# Altium PCB board.PcbDoc
Units mm, origin at the board's own origin, x right, y up, seen from the top; angles counter-clockwise.
Board outline 20.5 x 13 mm, 2 copper layers (Top Layer, Bottom Layer), stack 0.97 mm thick; 31 components, 23 nets, 86 pads, 12 vias.
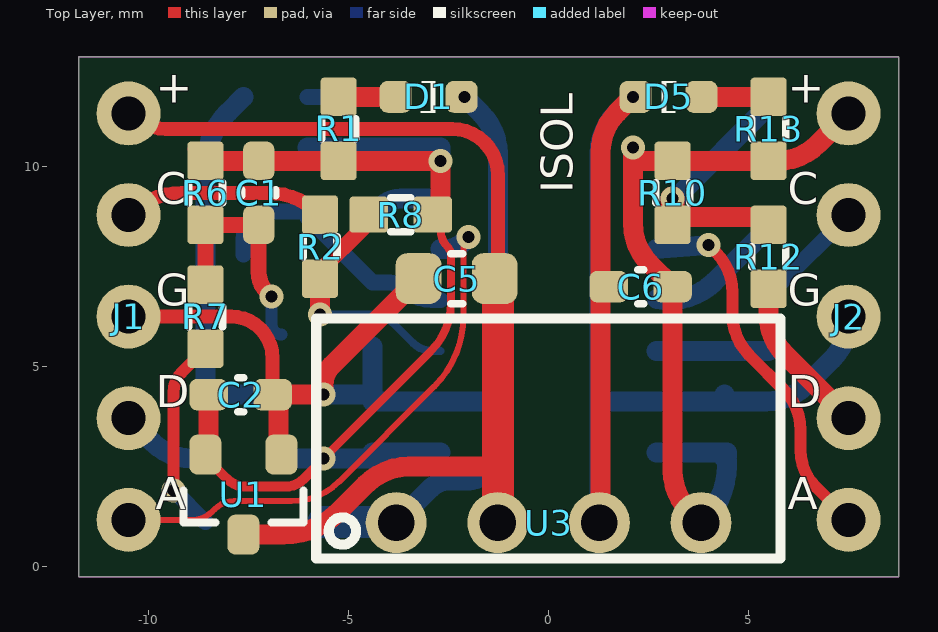
[diagram p0: Top Layer view]
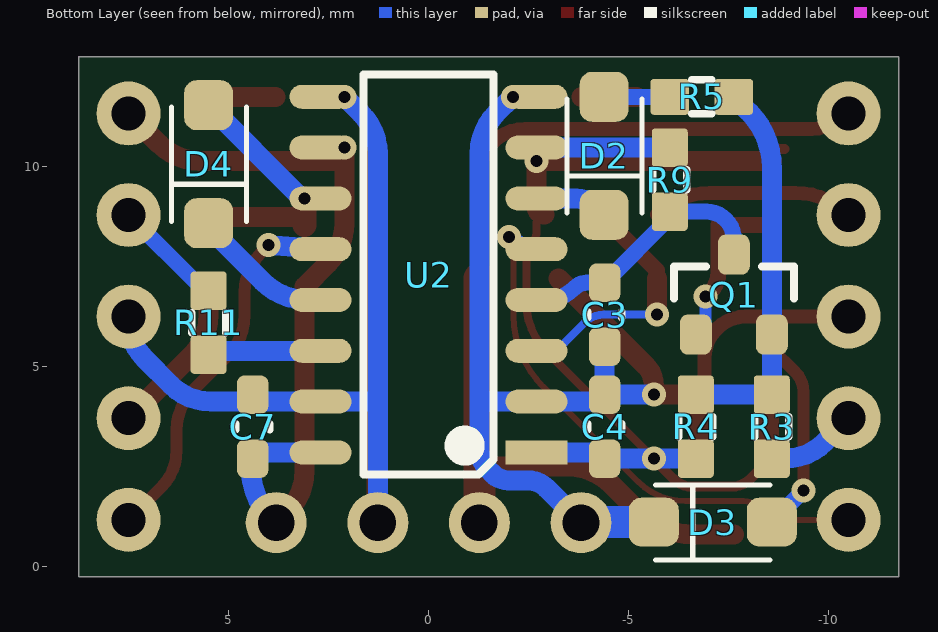
[diagram p1: Bottom Layer view, seen from below]
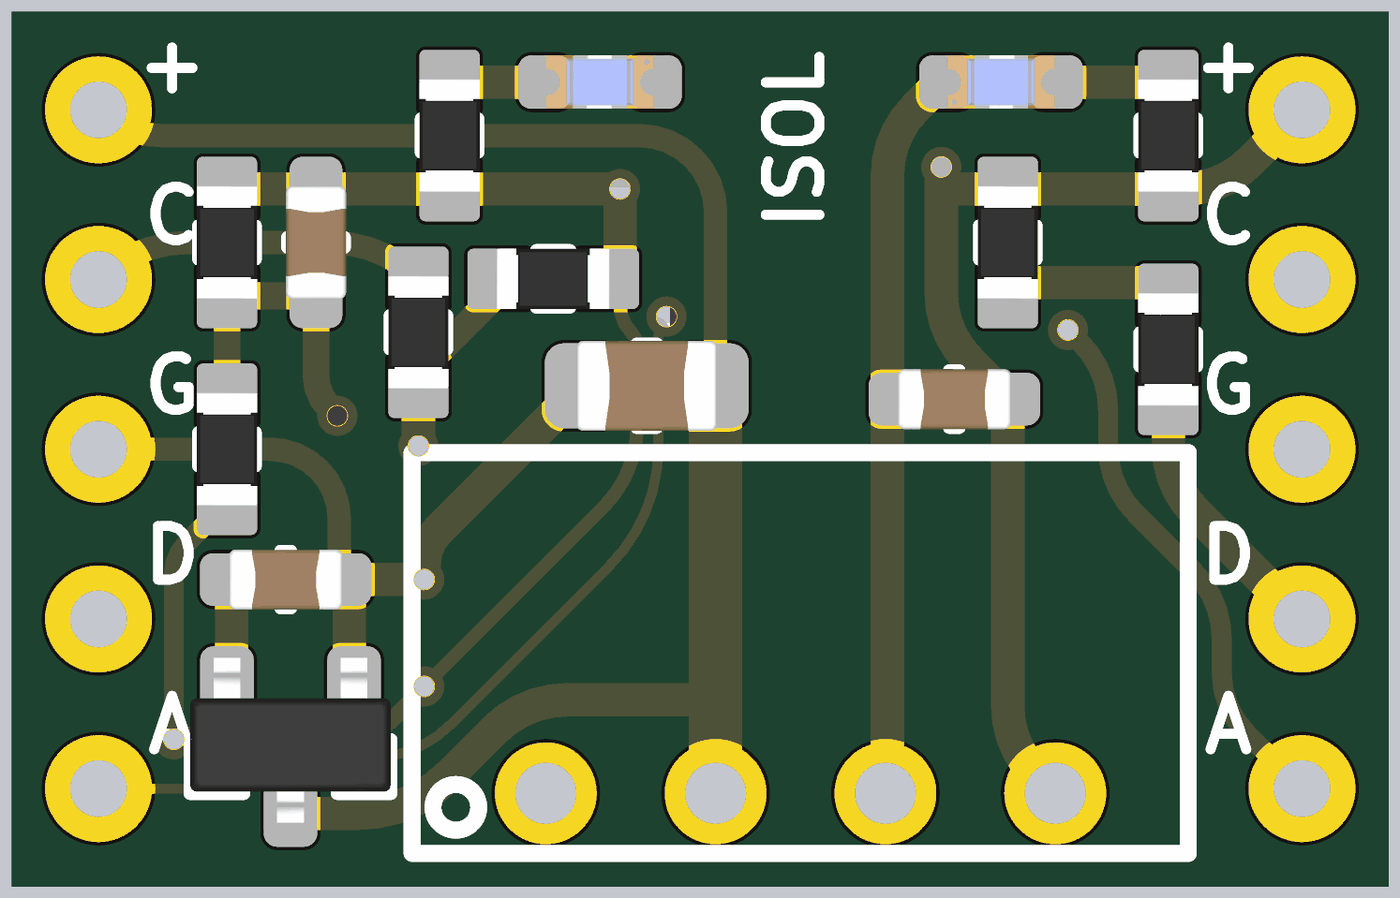
[diagram p2: 3D render of the assembled board from above, using the file's embedded part models]
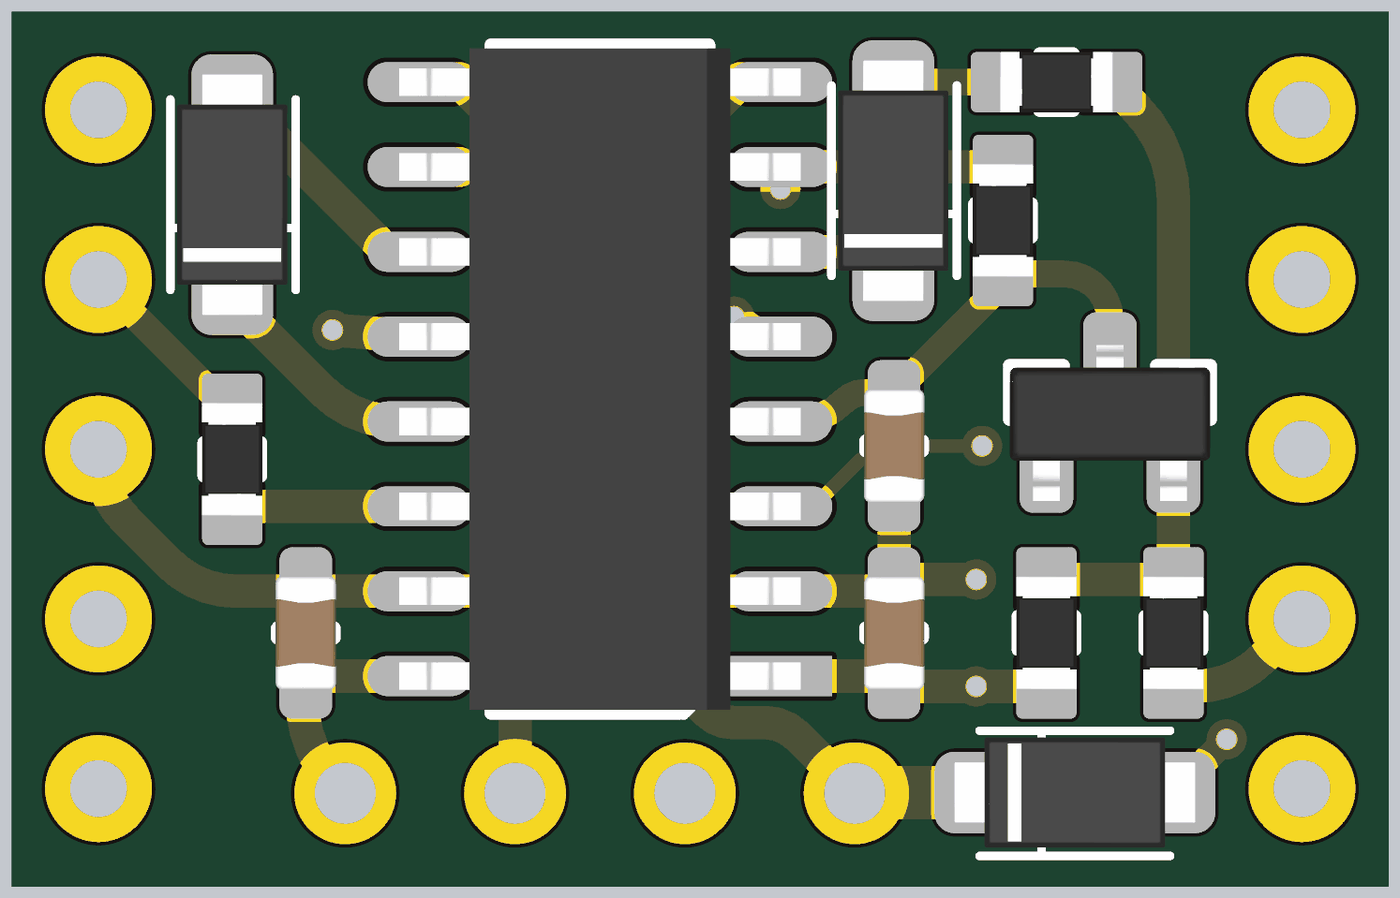
[diagram p3: 3D render of the assembled board from below, using the file's embedded part models]

## Layer stack, top to bottom
Top Solder: solder mask 0.0127, Solder Resist, Dk 3.8
Top Layer: signal copper 0.035
Dielectric: core 0.9, FR-4, Dk 4.5
Bottom Layer: signal copper 0.035
Bottom Solder: solder mask 0.0127, Solder Resist, Dk 3.8

## Board outline
-11.75,-0.25 -11.75,12.75 8.75,12.75 8.75,-0.25

## Design rules (kind name [scope] priority, off if disabled: settings)
AcuteAngle [All] p1: minimum=6.00000000000000E+0001 checktracksonly=FALSE
BoardOutlineClearance [All] p1: gap=0.3 ignorepadtopadclearanceinfootprint=FALSE
Clearance Clearance_1 [All] p1: gap=0.25 ignorepadtopadclearanceinfootprint=FALSE except(0.13: Arc-Arc Arc-Track Arc-SMDPad Arc-Via Track-Track Track-SMDPad Track-Via SMDPad-SMDPad SMDPad-Via THPad-Via Via-Via; 0.15: Arc-THPad Arc-Text Arc-Hole Track-THPad Track-Text Track-Hole SMDPad-THPad SMDPad-Text SMDPad-Hole THPad-THPad THPad-Text THPad-Hole Via-Text Via-Hole Fill-Text Fill-Hole Poly-Text Poly-Hole Region-Text Region-Hole Text-Text Text-Hole)
ComponentClearance ComponentClearance_1 [IsFree] p1: gap=-1 collisioncheckmode=3 verticalgap=2540 showdistances=FALSE
ComponentClearance [All] p2: gap=0.3 collisioncheckmode=3 verticalgap=0.254 showdistances=FALSE donotcheckwithout3dbody=TRUE
Height [All] p1: minheight=0 maxheight=500 prefheight=12.7
HoleSize [All] p1: absolutevalues=TRUE maxlimit=6 minlimit=0.2 maxpercent=80.000 minpercent=20.000
HoleToHoleClearance HoleToHoleClearance_1 [IsVia vs IsThruPin] p1: gap=0.7 allowstackedmicrovias=TRUE
HoleToHoleClearance [All] p2: gap=0.5 allowstackedmicrovias=TRUE
MinimumSolderMaskSliver [All] p1 off: minsoldermaskwidth=0.254
PlaneClearance [All] p1: clearance=0.45
PlaneConnect [All] p1: planeconnectstyle=Direct reliefexpansion=0.3 reliefentries=4 reliefconductorwidth=0.381 reliefairgap=0.178
PolygonConnect [All] p1: connectstyle=Direct reliefconductorwidth=0.381 reliefentries=4 polygonreliefangle="90 Angle" airgapwidth=0.356
RoutingVias [All] p1: holewidth=0.3 width=0.6 viastyle="Through Hole" minholewidth=0.2 minwidth=0.45 maxholewidth=0.9 maxwidth=1.27
SilkToSilkClearance [All] p1 off: silktosilkclearance=0.254
SilkToSolderMaskClearance [IsPad] p1 off: minsilkscreentomaskgap=0.254 clearancetoexposedcopper=TRUE
SolderMaskExpansion [All] p1: expansion=0.05 istentingtop=FALSE
SupplyNets "Schematic Supply Nets_4" [InNet('3V3')] p1: voltage=0.000
SupplyNets "Schematic Supply Nets_3" [InNet('GND')] p2: voltage=0.000
SupplyNets "Schematic Supply Nets_2" [InNet('GNDi')] p3: voltage=0.000
SupplyNets "Schematic Supply Nets_1" [InNet('5V')] p4: voltage=0.000
SupplyNets "Schematic Supply Nets" [InNet('3V3i')] p5: voltage=0.000
UnRoutedNet [All] p1: checkbadconnections=TRUE
Width [All] p1: maxlimit=3.81 minlimit=0.14 preferedwidth=0.254
20 further rules are at their usual default settings.

## Components (designator, comment, footprint, x,y, rotation, side; value= is the part's Value field where it differs from the comment)
C1 "1nF" C0603 -7.247,9.345 r90 top
C2 "1uF" C0603 -7.7,4.3 r180 top
C3 "10pF" C0603 -4.4,6.3 r90 bottom
C4 "100nF" C0603 -4.4,3.5 r270 bottom
C5 "1uF" C0805 -2.3,7.2 r0 top
C6 "1uF" C0603 2.3,7 r0 top
C7 "100nF" C0603 4.4,3.5 r270 bottom
D1 "BLU" LED-0603-BLU -3,11.745 r0 top
D2 "DIODE" SOD-123FL -4.388,10.27 r270 bottom
D3 "SCHOTTKY DIODE" SOD-123FL -7.104,1.112 r0 bottom
D4 "SCHOTTKY DIODE" SOD-123FL 5.5,10.06 r270 bottom
D5 "BLU" LED-0603-BLU 3,11.745 r180 top
J1 "SWD" HDR-1X5_2.54 -10.5,6.25 r0 top
J2 "SWD_ISOL" HDR-1X5_2.54 7.5,6.25 r0 top
Q1 "MMBT3904" SOT-23 -7.628,6.8 r270 bottom
R1 "1k" R0603 -5.25,10.945 r270 top
R2 "100" R0603 -5.715,8 r270 top
R3 "10" R0603 -8.579,3.5 r270 bottom
R4 "1k5" R0603 -6.678,3.5 r270 bottom
R5 "100" R0603 -6.828,11.745 r180 bottom
R6 "1.3k" R0603 -8.579,9.345 r90 top
R7 "820" R0603 -8.579,6.25 r90 top
R8 "1k5" R0603 -3.7,8.8 r0 top
R9 "820" R0603 -6.028,9.675 r90 bottom
R10 "1k5" R0603 3.1,9.345 r90 top
R11 "100" R0603 5.5,6.1 r270 bottom
R12 "10" R0603 5.5,7.744 r90 top
R13 "1k" R0603 5.5,10.945 r270 top
U1 "XC6206P332MR" SOT-23 -7.628,1.8 r90 top
U2 "π142M31" SOIC-16 0,7.3 r90 bottom
U3 "AM1SS-0503SJZ" PWRM-TH_B2405S-1WR2 0,1.1 r0 top

## Footprints (in the part's own frame and the unit in brackets; to place one, negate y for a bottom-side part, rotate by r counter-clockwise, add the part's x,y. Pads: shape width x height; smd on the part's side, far side on the other; paste and mask are expansions set on the pad)
C0603 [mil] "Chip Capacitor"
  rrect50% 38x31 smd mask+1.97: 1(-31.5,0) 2(31.5,0)
  silkscreen extent -3,-17 3,17, body extent -33,-18 33,18, height 35
C0805 [mil] "Chip Capacitor"
  rrect50% 45x50 smd mask+1.97: 1(-37.5,0) 2(37.5,0)
  silkscreen extent -6,-25 6,25, body extent -41,-27 41,27, height 53
HDR-1X5_2.54 [mm]
  round 1.6 hole 0.85: 1(0,5.08) 2(0,2.54) 3(0,0) 4(0,-2.54) 5(0,-5.08)
LED-0603-BLU [mm]
  rrect50% 0.8x0.8 smd paste+0: 1(-0.825,0) 2(0.825,0)
  silkscreen extent -0.2,-0.4 0.18,0.4, body extent -0.8,-0.4 0.8,0.4, height 0.6
PWRM-TH_B2405S-1WR2 [mil]
  round 60 hole 36 paste-99999 mask+2: 1(-150,0) 2(-50,0) 3(50,0) 4(150,0)
  silkscreen extent -229,-35 228,201, body extent -228,-35 228,201, height 400
R0603 [mil] "Chip Resistor; Body 1.6 x 0.8 mm (LxW typ)"
  rrect20% 38x35.43 smd mask+1.97: 1(-31.5,0) 2(31.5,0)
  silkscreen extent -10,-17 10,17, body extent -33,-18 33,18, height 22
SOD-123FL [mm]
  rrect50% 1.25x1.22 smd: 1(-1.475,0) 2(1.475,0)
  silkscreen extent -1.43,-0.92 1.43,0.95, body extent -1.8,-0.83 1.8,0.82, height 0.95
SOIC-16 [mm]
  rect 0.6x1.55 smd mask+0.07: 1(-4.445,-2.7)
  oval 0.6x1.55 smd mask+0.07: 2(-3.175,-2.7) 3(-1.905,-2.7) 4(-0.635,-2.7) 5(0.635,-2.7) 6(1.905,-2.7) 7(3.175,-2.7) 8(4.445,-2.7) 9(4.445,2.7) 10(3.175,2.7) 11(1.905,2.7) 12(0.635,2.7) 13(-0.635,2.7) 14(-1.905,2.7) 15(-3.175,2.7) 16(-4.445,2.7)
  silkscreen extent -5,-1.63 5,1.62, body extent -4.95,-3 4.95,3, height 1.4
SOT-23 [mm]
  rrect50% 1x0.8 smd mask+0.05: 1(1,-0.95) 2(1,0.95) 3(-1,0)
  silkscreen extent -0.7,-1.5 0.1,1.5, body extent -1.27,-1.5 1.33,1.5, height 1.1

## Part data
C1 C3 C4 C7: library part CAP, "100nF 50V 0603"
C2 C6: library part CAP, "1uF 50V 0603"
C5: library part CAP, "1uF 50V 0805"
D1 D5: library part LED-0603-BLUE, "DIODE LED 0603 BLUE"
D2 D3 D4: library part US1M-13-F
J1 J2: library part "CONN MOLEX HDR-M 1x4"
Q1: library part MMBT2222ALT1G, "MMBT3904 \"1AM\""
R1 R13: library part RES, "1k 0603"
R2 R11: library part RES, "100 0603"
R3 R12: library part RES, "10 0603"
R4 R8 R10: library part RES, "1.5k 0603"
R5: library part RES, "100R 0603"
R6: library part RES, "1.3k 0603"
R7 R9: library part RES, "820 0603"
U1: library part Component_4_1
U3: library part B0503S-1WR2

## Via types
v1: diameter 0.6, hole 0.3, Top Layer to Bottom Layer, tented both sides, 12 vias

## Nets (pads, with @x,y where several pads share a name; then routed paths per layer and width w, separated by ;. In a path a pad name is that pad's centre, name@x,y a point inside that pad or via, vN(x,y) a via of type N, cw(c..) or ccw(c..) an arc to the next point about the centre after c; other vN are vias at no path point)
3V3: C1.2 C2.2 C4.2 R1.2 R4.2 R6.2 R8.2 R9.2 U1.2 U2.1 U2.7 | length 27.8
  Top Layer w0.2: v1(-5.629,2.7) -2.949,5.379 ccw(c-4.174,6.604) -2.442,6.604 -2.442,7.788 ccw(c-2.739,7.788) -2.529,7.998 cw(c-2.116,8.411) -2.7,8.411 -2.7,8.6 R8.2
  Top Layer w0.25: R6.2@-8.9,10.445 R6.2@-8.579,10.445 ; U1.2@-8.5,2.65 -8.051,2.201 ccw(c-7.566,2.686) -7.566,2 -6.592,2 ccw(c-6.592,2.686) -6.108,2.201 v1@-5.619,2.69
  Top Layer w0.5: R6.2 R1.2@-5.338,10.145 ; U1.2@-8.507,2.8 C2.2@-8.507,4.3 ; R1.2 v1(-2.7,10.145) -2.7,9 cw(c-2.9,9) R8.2
  Bottom Layer w0.5: R4.2 v1(-5.629,2.7) C4.2 ; R9.2 U2.7 v1(-2.7,10.145) ; C4.2@-4.4,2.68 C4.2 ; U2.1 -4.4,2.855 C4.2
3V3i: C6.2 C7.2 J2.1 R10.2 R13.2 U2.10 U2.16 U3.4 | length 19.5
  Top Layer w0.5: 2.105,10.145 R10.2 5.726,10.145 ccw(c5.726,11.567) 6.731,10.561 J2.1 ; v1(2.105,10.475) 2.105,8.584 ccw(c3.527,8.584) 2.522,7.578 C6.2 3.1,2.399 ccw(c4.523,2.399) 3.517,1.393 U3.4
  Bottom Layer w0.5: U2.16 4.455,2.855 4.455,2.755 C7.2 4.455,2.645 4.455,2.524 cw(c2.48,2.524) 3.876,1.127 U3.4
5V: C5.2 J1.1 U1.3 U3.2 | length 26
  Top Layer w0.25: J1.1@-11,11.33 J1.1@-10.75,11.58
  Top Layer w0.35: J1.1 ccw(c-9.57,12.26) -9.57,10.945 -2.418,10.945 cw(c-2.418,9.797) -1.27,9.797 C5.2@-1.27,7.2
  Top Layer w0.5: U1.3 -6.631,0.8 ccw(c-6.631,2.747) -5.255,1.37 -4.577,2.048 cw(c-3.485,0.955) -3.485,2.5 -1.297,2.5 cw(c-1.297,2.462) -1.27,2.489
  Top Layer w0.8: U3.2 -1.27,2.489 -1.27,2.5 C5.2@-1.27,7.2
AUX: J1.5 U2.5 | length 14.1
  Top Layer w0.15: J1.5 -8.9,1.17 ccw(c-8.9,1.856) -8.415,1.371 -8.352,1.434 cw(c-7.868,0.949) -7.868,1.635 -6.423,1.635 ccw(c-6.423,3.314) -5.236,2.127 -2.858,4.505 ccw(c-4.619,6.267) -2.128,6.267 -2.128,7.938 cw(c-1.708,7.938) v1(-2.005,8.235)
  Top Layer w0.18: J1.5@-11,1.17 J1.5
  Bottom Layer w0.5: U2.5 -2.589,7.935 ccw(c-2.589,8.621) -2.104,8.136 v1(-2.005,8.235)
AUXi: J2.5 U2.12 | length 9.4
  Top Layer w0.3: v1(4,8.035) 4.183,7.852 cw(c3.178,6.846) 4.6,6.846 4.6,6.289 ccw(c6.022,6.289) 5.017,5.283 5.883,4.417 cw(c4.878,3.411) 6.3,3.411 6.3,2.9 ccw(c7.58,2.9) 6.675,1.995 J2.5
  Bottom Layer w0.5: U2.12 v1(4,8.035)
GND: C2.1 C3.1 C4.1 C5.1 D1.2 D3.2 J1.3 U1.1 U2.2 U2.8 U3.1 | length 31.8
  Top Layer w0.35: J1.3 -7.937,6.25 cw(c-7.937,5.213) -6.9,5.213 C2.1
  Top Layer w0.5: C2.1 v1(-5.629,4.3) -5.629,4.54 cw(c-4.943,4.54) -5.428,5.025 C5.1 ; U1.1@-6.75,2.8 C2.1@-6.75,4.3
  Bottom Layer w0.5: v1@-5.614,4.314 -5.6,4.3 C4.1 ; C3.1 C4.1 ; U3.1 -2.952,1.958 cw(c-2.467,1.473) -2.467,2.159 -1.983,2.159 ccw(c-1.983,2.683) -1.613,2.312 -1.471,2.454 ccw(c-1.956,2.939) -1.27,2.939 -1.27,4.125 ; v1(-2.105,11.745) -1.687,11.327 cw(c-2.692,10.321) -1.27,10.321 -1.27,4.125 ; C4.1 -4.4,4.125 U2.2 -1.27,4.125
  Bottom Layer w0.8: D3.2 -3.84,1.112 cw(c-3.84,1.07) U3.1
GNDi: C6.1 C7.1 D5.2 J2.3 U2.9 U2.15 U3.3 | length 29.4
  Top Layer w0.5: U3.3 ccw(c1.198,1.172) 1.3,1.172 1.3,10.351 cw(c2.722,10.351) 1.717,11.357 v1(2.105,11.745)
  Bottom Layer w0.5: U3.3 1.27,4.125 ; v1(2.105,11.745) 1.687,11.327 ccw(c2.692,10.321) 1.27,10.321 1.27,4.125 ; C7.1 C7.1@4.4,4.125 ; J2.3 7.5,6.189 cw(c6.078,6.189) 7.083,5.183 6.442,4.542 cw(c5.436,5.547) 5.436,4.125 C7.1@4.4,4.125 ; 1.27,4.125 U2.15 C7.1@4.4,4.125
NetC1_1: C1.1 Q1.1 R6.1 R7.2 | length 5.8
  Top Layer w0.4: R7.2 R6.1 C1.1 -7.247,7.353 ccw(c-6.561,7.353) -7.046,6.868 v1(-6.928,6.75)
  Bottom Layer w0.3: v1(-6.928,6.75) -6.928,6.049 ccw(c-6.678,6.049) Q1.1
NetC3_2: C3.2 Q1.3 R9.1 U2.4 | length 6.6
  Bottom Layer w0.4: Q1.3 -7.628,8.189 cw(c-6.943,8.189) -6.943,8.875 R9.1 -6.028,8.728 C3.2 -3.961,7.1 cw(c-3.961,6.665) -3.653,6.973 ccw(c-2.91,7.716) -2.91,6.665 U2.4
NetD1_1: D1.1 R1.1 | length 1.4
  Top Layer w0.5: R1.1@-5.2,11.745 D1.1
NetD2_1: D2.1 R5.1 | length 1.6
  Bottom Layer w0.4: R5.1 D2.1
NetD2_2: D2.2 U2.6 | length 1.8
  Bottom Layer w0.5: D2.2 -4.178,9.004 cw(c-3.693,8.519) -3.693,9.205 U2.6
NetD3_1: D3.1 R7.1 | length 5
  Top Layer w0.3: v1(-9.374,1.908) -9.374,4.37 cw(c-8.688,4.37) -9.173,4.855 R7.1
  Bottom Layer w0.4: v1(-9.374,1.908) D3.1
NetD4_2: D4.2 U2.13 | length 3.6
  Bottom Layer w0.5: U2.13@2.706,6.694 ccw(c3.025,8.252) 4.149,7.127 5.5,8.478 D4.2
NetD5_1: D5.1 R13.1 | length 1.7
  Top Layer w0.5: D5.1 R13.1
NetJ1_2: J1.2 R2.1 | length 5.1
  Top Layer w0.35: J1.2 cw(c-9.16,7.45) -9.16,9.345 -7.03,9.345 cw(c-7.03,7.485) R2.1
NetJ1_4: J1.4 R3.2 | length 2.3
  Bottom Layer w0.5: J1.4 -9.907,3.117 ccw(c-8.901,4.122) -8.901,2.7 R3.2
NetJ2_2: J2.2 R11.1 | length 2.8
  Bottom Layer w0.4: R11.1 ccw(c5.5,7.166) 5.688,6.978 J2.2 ; R11.1@5.6,6.9 R11.1@5.61,6.9
NetJ2_4: J2.4 R12.1 | length 4
  Top Layer w0.5: R12.1 5.5,6.299 ccw(c6.922,6.299) 5.917,5.293 J2.4
SWC: R2.2 R8.1 U2.3 | length 6.3
  Top Layer w0.4: R2.2 -5.715,7.4 -4.602,8.513 ccw(c-4.84,8.75) R8.1@-4.507,8.799
  Top Layer w0.5: v1(-5.715,6.3) R2.2
  Bottom Layer w0.2: v1(-5.715,6.3) -4.384,6.3 cw(c-4.384,5.614) -3.899,6.099 -3.396,5.596 ccw(c-2.911,6.081) -2.911,5.395 U2.3
SWCi: R11.2 U2.14 | length 2.8
  Bottom Layer w0.5: U2.14 R11.2@5.5,5.395
SWD: Q1.2 R3.1 R4.1 R5.2 | length 9.5
  Bottom Layer w0.5: Q1.2@-8.579,5.629 R3.1 R4.1 ; Q1.2 -8.579,9.985 cw(c-6.622,9.985) -8.005,11.368 R5.2
SWDi: D4.1 R10.1 R12.2 U2.11 | length 6.4
  Top Layer w0.5: R10.1@3.1,8.745 R12.2@5.5,8.745
  Top Layer w0.6: R10.1@3.1,8.545 v1@3.1,9.205
  Bottom Layer w0.5: v1(3.1,9.205) ccw(c3.1,9.374) 3.219,9.254 D4.1

## Keep-outs
Keep-Out Layer:
  the board outline again, w0

## Silkscreen, mask and mechanical layers (free items; w line width, h text height)
Top Overlay:
  text "+" at -9.817,11.6 h0.8
  text "+" at 5.983,11.6 h0.8
  text "ISOL" at 0.6,9.334 h0.8 r90
  text "C" at -9.817,9.06 h0.8
  text "C" at 5.983,9.06 h0.8
  text "G" at -9.817,6.52 h0.8
  text "G" at 5.983,6.52 h0.8
  text "D" at -9.817,3.98 h0.8
  text "D" at 5.983,3.98 h0.8
  text "A" at -9.817,1.44 h0.8
  text "A" at 5.983,1.44 h0.8
Board Shape:
  the board outline again, w0
Mechanical 15:
  lines w1: 0,0.5 0,12